# Altium PCB IronDoorControl.PcbDoc
Units mm, origin at the board's own origin, x right, y up, seen from the top; angles counter-clockwise.
Board outline 152.4 x 101.6 mm, 2 copper layers (Top Layer, Bottom Layer); 11 components, 10 nets, 84 pads, 0 vias.
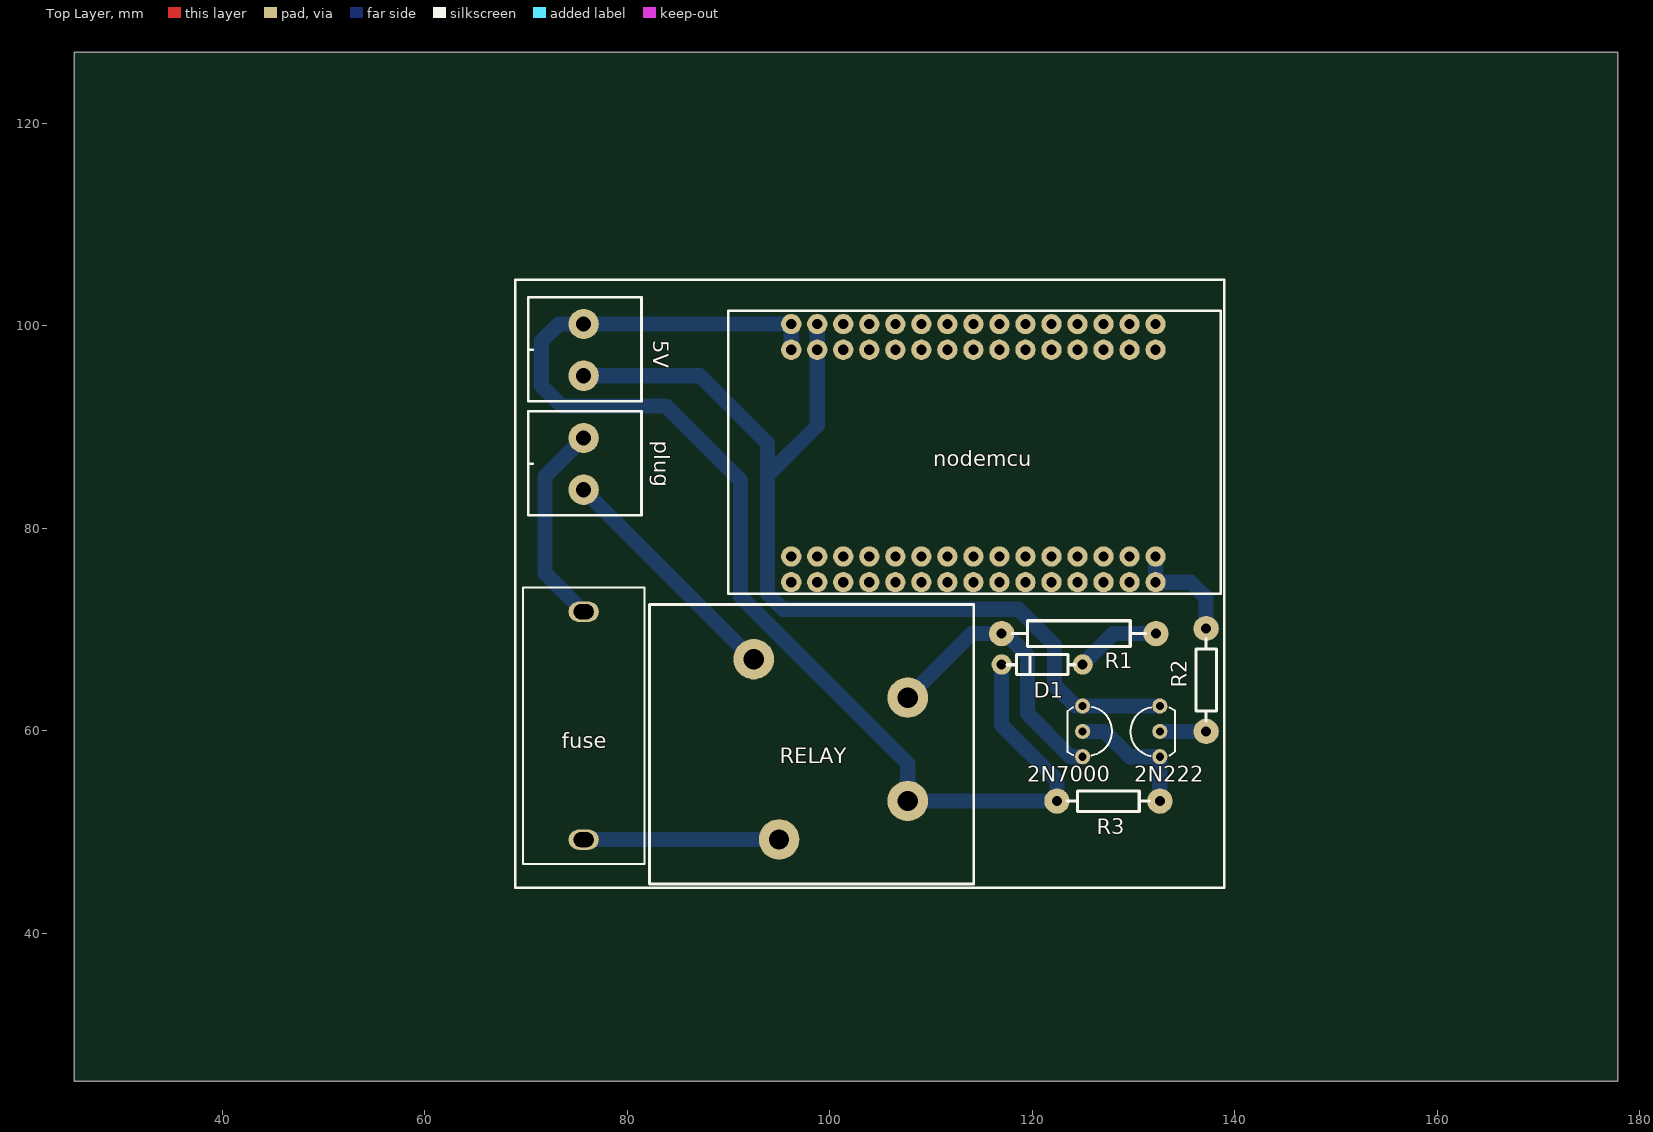
[diagram p0: Top Layer view]
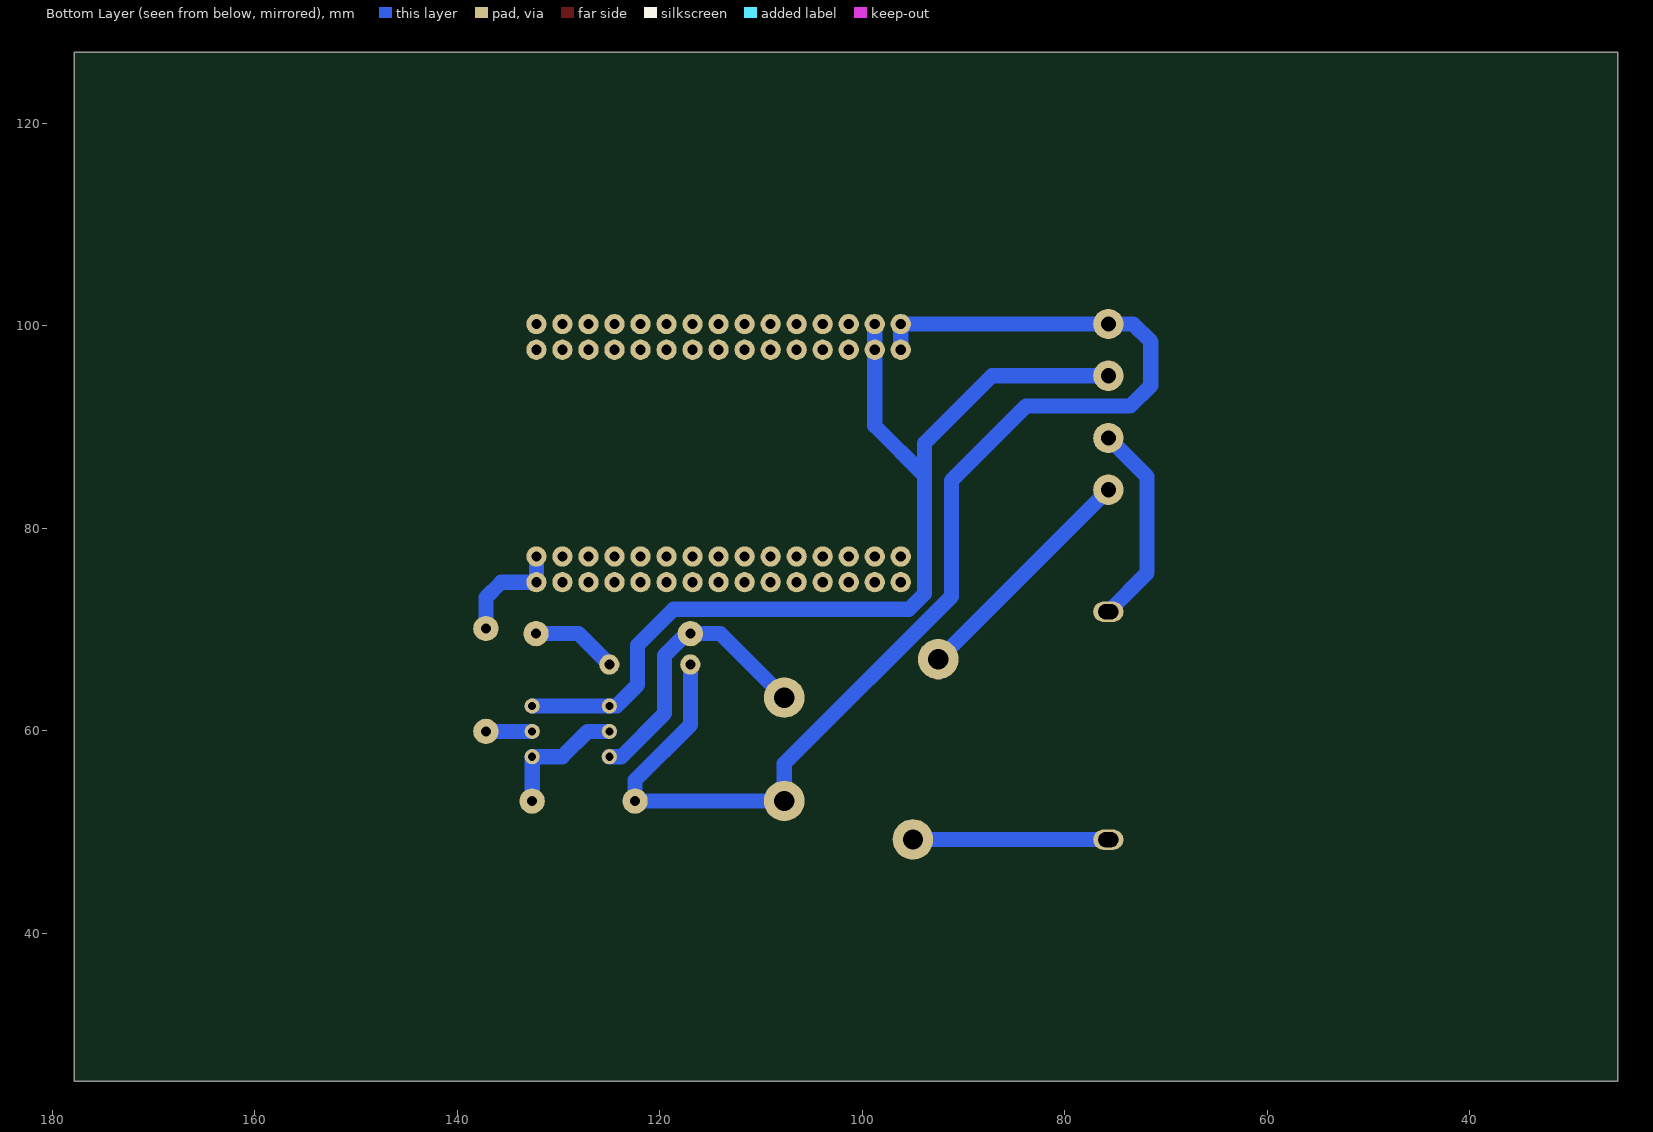
[diagram p1: Bottom Layer view, seen from below]

## Layer stack, top to bottom
Top Layer: signal copper 0.0356
Dielectric: dielectric 0.32, FR-4, Dk 4.8
Bottom Layer: signal copper 0.0356

## Board outline
25.4,25.4 177.8,25.4 177.8,127 25.4,127

## Design rules (kind name [scope] priority, off if disabled: settings)
Clearance [All] p1: gap=0.254
PolygonConnect [All] p1: connectstyle=Relief reliefconductorwidth=0.254 reliefentries=4 polygonreliefangle="90 Angle"
RoutingVias [All] p1: holewidth=0.711 width=1.27 viastyle="Through Hole" minholewidth=0.711 minwidth=1.27 maxholewidth=0.711 maxwidth=1.27
SilkscreenOverComponentPads [All] p1: minsilkscreentomaskgap=0.254
SolderMaskExpansion [All] p1: expansion=0.102
Width [All] p1: maxlimit=3 minlimit=1 preferedwidth=2 minimp=50.000000 maximp=50.000000 favimp=50.000000
27 further rules are at their usual default settings.

## Components (designator, comment, footprint, x,y, rotation, side; value= is the part's Value field where it differs from the comment)
2N222 "NPN" TO92-MPS2222A 132.588,57.444 r180 top
2N7000 "MOS" TO92-MPS2222A 124.968,62.444 r0 top
5V "BigGreenMos" BigGreenMos 75.692,97.616 r270 top
D1 "1N4001" DIODE8mm 124.968,66.548 r180 top
fuse "FUSE20mm" FUSE20mm 69.692,74.156 r270 top
nodemcu "nodemcu" nodemcu 96.19,74.676 r0 top
plug "BigGreenMos" BigGreenMos 75.692,86.36 r270 top
R1 "1W10" RES0.6 132.208,69.596 r180 top
R2 "1K" RES0.4 137.16,59.944 r90 top
R3 "1K" RES0.4 122.428,53.056 r0 top
RELAY "SLA-05VDC-SL-C" SLA-05VDC-SL-C 110.196,58.176 r90 top

## Footprints (in the part's own frame and the unit in brackets; to place one, negate y for a bottom-side part, rotate by r counter-clockwise, add the part's x,y. Pads: shape width x height; smd on the part's side, far side on the other; paste and mask are expansions set on the pad)
BigGreenMos [mm] "BigGreenMos"
  round 3 hole 1.5: 1(-2.55,0) 2(2.55,0)
  silkscreen extent -5.21,-5.46 5.08,5.72
DIODE8mm [mm]
  round 2 hole 1: N(8,0) P(0,0)
  silkscreen extent 0.75,-1 7.45,1
FUSE20mm [mm]
  oval 2x3 hole 1.5 slot 2 at 90 deg: 1(24.9,6) 2(2.4,6)
  silkscreen extent 0,0 27.3,12
nodemcu [mm] "nodemcu"
  round 2 hole 1: 3.3a(0,0) 3.3a(0,2.54) 3.3b(23.13,0) 3.3b(23.13,2.54) 3.3c(10.28,22.95) 3.3c(10.28,25.49) A0(35.98,22.95) A0(35.98,25.49) CLK(15.42,22.95) CLK(15.42,25.49) CMD(20.56,22.95) CMD(20.56,25.49) D0(35.98,0) D0(35.98,2.54) D1(33.41,0) D1(33.41,2.54) D2(30.84,0) D2(30.84,2.54) D3(28.27,0) D3(28.27,2.54) D4(25.7,0) D4(25.7,2.54) D5(17.99,0) D5(17.99,2.54) D6(15.42,0) D6(15.42,2.54) D7(12.85,0) D7(12.85,2.54) D8(10.28,0) D8(10.28,2.54) EN(7.71,22.95) EN(7.71,25.49) Ga(2.57,0) Ga(2.57,2.54) Gb(20.56,0) Gb(20.56,2.54) Gc(2.57,22.95) Gc(2.57,25.49) Gd(12.85,22.95) Gd(12.85,25.49) RST(5.14,22.95) RST(5.14,25.49) RSVa(30.84,22.95) RSVa(30.84,25.49) RSVb(33.41,22.95) RSVb(33.41,25.49) RX(7.71,0) RX(7.71,2.54) SD0(17.99,22.95) SD0(17.99,25.49) SD1(23.13,22.95) SD1(23.13,25.49) SD2(25.7,22.95) SD2(25.7,25.49) SD3(28.27,22.95) SD3(28.27,25.49) TX(5.14,0) TX(5.14,2.54) Vin(0,22.95) Vin(0,25.49)
  silkscreen extent -6.22,-1.14 42.42,26.8
RES0.4 [mm]
  round 2.5 hole 1: 1(0,0) 2(10.16,0)
  silkscreen extent 1.02,-1.02 9.14,1.02
RES0.6 [mm]
  round 2.5 hole 1: 1(0,0) 2(15.24,0)
  silkscreen extent 1.02,-1.27 14.22,1.27
SLA-05VDC-SL-C [mm] "SLA-05VDC-SL-C"
  round 4 hole 2: A(8.9,17.7) C1(-5.1,2.5) C2(5.1,2.5) COM2(-8.9,15.2)
  silkscreen extent -13.3,-4 14.3,28
TO92-MPS2222A [mm]
  round 1.5 hole 0.8: 1(0,-2.5) 2(0,0) 3(0,-5)
  silkscreen extent -1.5,-4.86 2.9,-0.08

## Part data
2N222: "NPN Transistor"
2N7000: library part NPN, "NPN Transistor"
D1: library part DIODE, "Diode"
R1 R2 R3: library part RES1

## Nets (pads, with @x,y where several pads share a name; then routed paths per layer and width w, separated by ;. In a path a pad name is that pad's centre, name@x,y a point inside that pad or via, vN(x,y) a via of type N, cw(c..) or ccw(c..) an arc to the next point about the centre after c; other vN are vias at no path point)
Net2N222_1: 2N222.1 R2.1 | length 4.6
  Bottom Layer w1.5: 2N222.1 R2.1
Net2N222_2: 2N222.2 2N7000.1 R3.2 | length 13
  Bottom Layer w1.5: 2N7000.1 127.127,59.944 129.627,57.444 2N222.2 R3.2
Net2N222_3: 2N222.3 2N7000.2 5V.2 nodemcu.Gc | length 98.4
  Bottom Layer w1.5: 5V.2 87.179,95.066 93.853,88.392 93.853,85.217 ; nodemcu.Gc@98.76,100.166 98.76,97.626 98.76,90.124 93.853,85.217 ; 2N222.3 2N7000.2 124.246,62.444 122.174,64.516 122.174,68.453 118.618,72.009 95.377,72.009 93.853,73.533 93.853,85.217
Net2N7000_2: 2N7000.3 R1.2 RELAY.C2 | length 27.9
  Bottom Layer w1.5: RELAY.C2 114.016,69.596 R1.2 ; RELAY.C2@108.164,63.256 RELAY.C2@108.164,63.276 ; R1.2@117.348,69.596 119.507,67.437 119.507,61.722 123.785,57.444 2N7000.3
Net5V_1: 5V.1 D1.N nodemcu.Vin R3.1 RELAY.C1 | length 125
  Bottom Layer w1.5: nodemcu.Vin@96.19,97.626 96.19,100.166 5V.1 73.242,100.166 71.501,98.425 71.501,94.107 73.533,92.075 83.82,92.075 91.186,84.709 91.186,73.279 107.696,56.769 107.696,53.524 107.472,53.3 107.696,53.3 107.92,53.3 108.164,53.056 R3.1 122.428,55.118 116.968,60.578 D1.N
NetD1_P: D1.P R1.1 | length 8.5
  Bottom Layer w1.5: D1.P 128.016,69.596 R1.1
Netfuse_1: fuse.1 RELAY.COM2 | length 20
  Bottom Layer w1.5: fuse.1 RELAY.COM2@94.976,49.256 ; RELAY.COM2@94.869,48.895 95.131,49.054 RELAY.COM2@95.464,49.256
Netfuse_2: fuse.2 plug.1 | length 20.3
  Bottom Layer w1.5: fuse.2 71.882,75.566 71.882,85.1 plug.1
Netnodemcu_D0: nodemcu.D0 R2.2 | length 11.2
  Bottom Layer w1.5: nodemcu.D0@132.17,77.216 132.17,74.676 135.636,74.676 137.16,73.152 R2.2
Netplug_2: plug.2 RELAY.A | length 23.7
  Bottom Layer w1.5: plug.2 RELAY.A@92.446,67.056
pads on no net: nodemcu.3.3a nodemcu.3.3b nodemcu.3.3c nodemcu.A0 nodemcu.CLK nodemcu.CMD nodemcu.D1 nodemcu.D2 nodemcu.D3 nodemcu.D4 nodemcu.D5 nodemcu.D6 nodemcu.D7 nodemcu.D8 nodemcu.EN nodemcu.Ga nodemcu.Gb nodemcu.Gd nodemcu.RST nodemcu.RSVa nodemcu.RSVb nodemcu.RX nodemcu.SD0 nodemcu.SD1 nodemcu.SD2 nodemcu.SD3 nodemcu.TX

## Silkscreen, mask and mechanical layers (free items; w line width, h text height)
Top Overlay:
  lines w0.254: 68.961,44.521 138.961,44.521 138.961,104.521 68.961,104.521 68.961,44.521